# EAGLE board Smart Driver Adapter_backup (EAGLE 9.6.2)
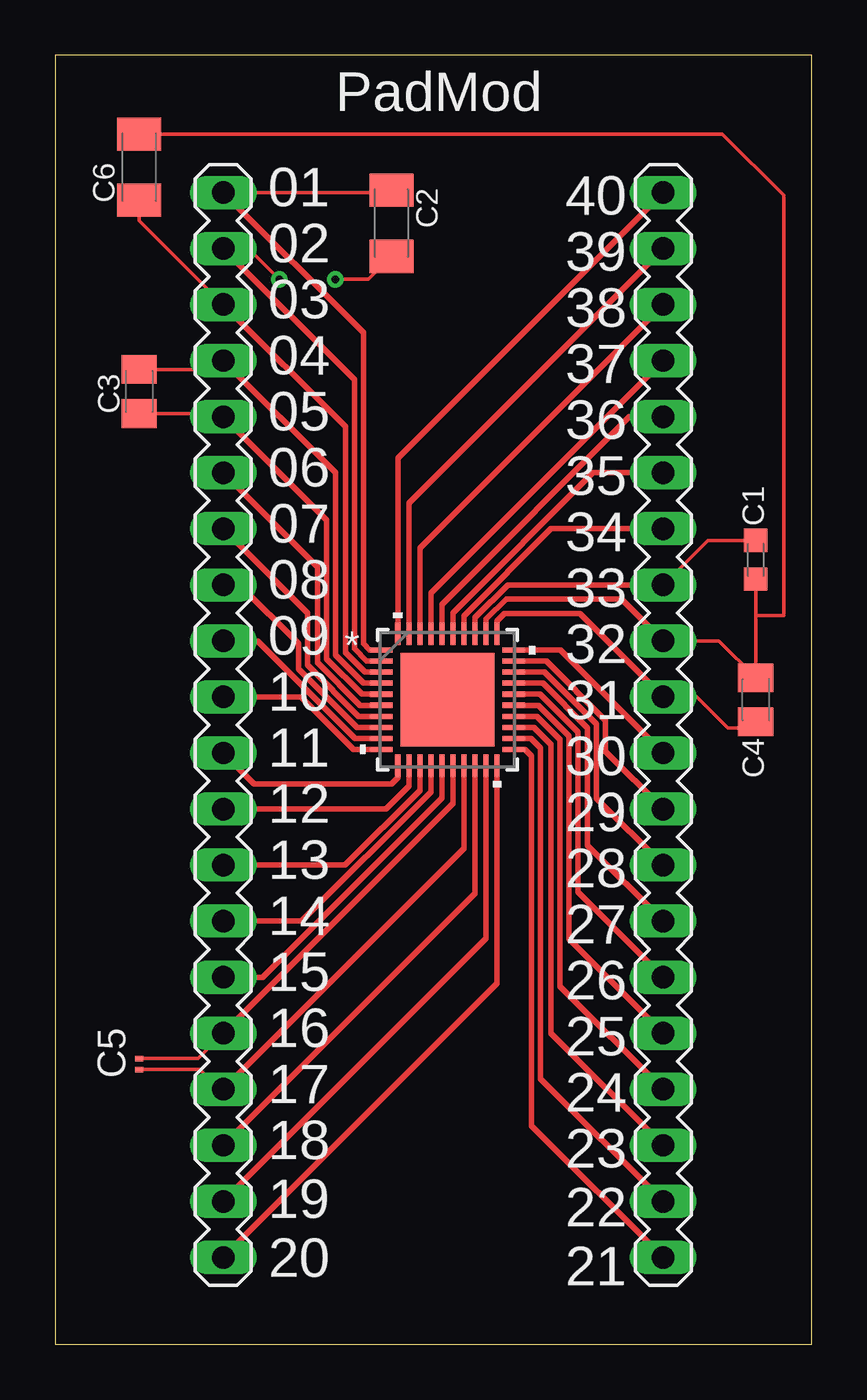
[diagram p0: board, top side]
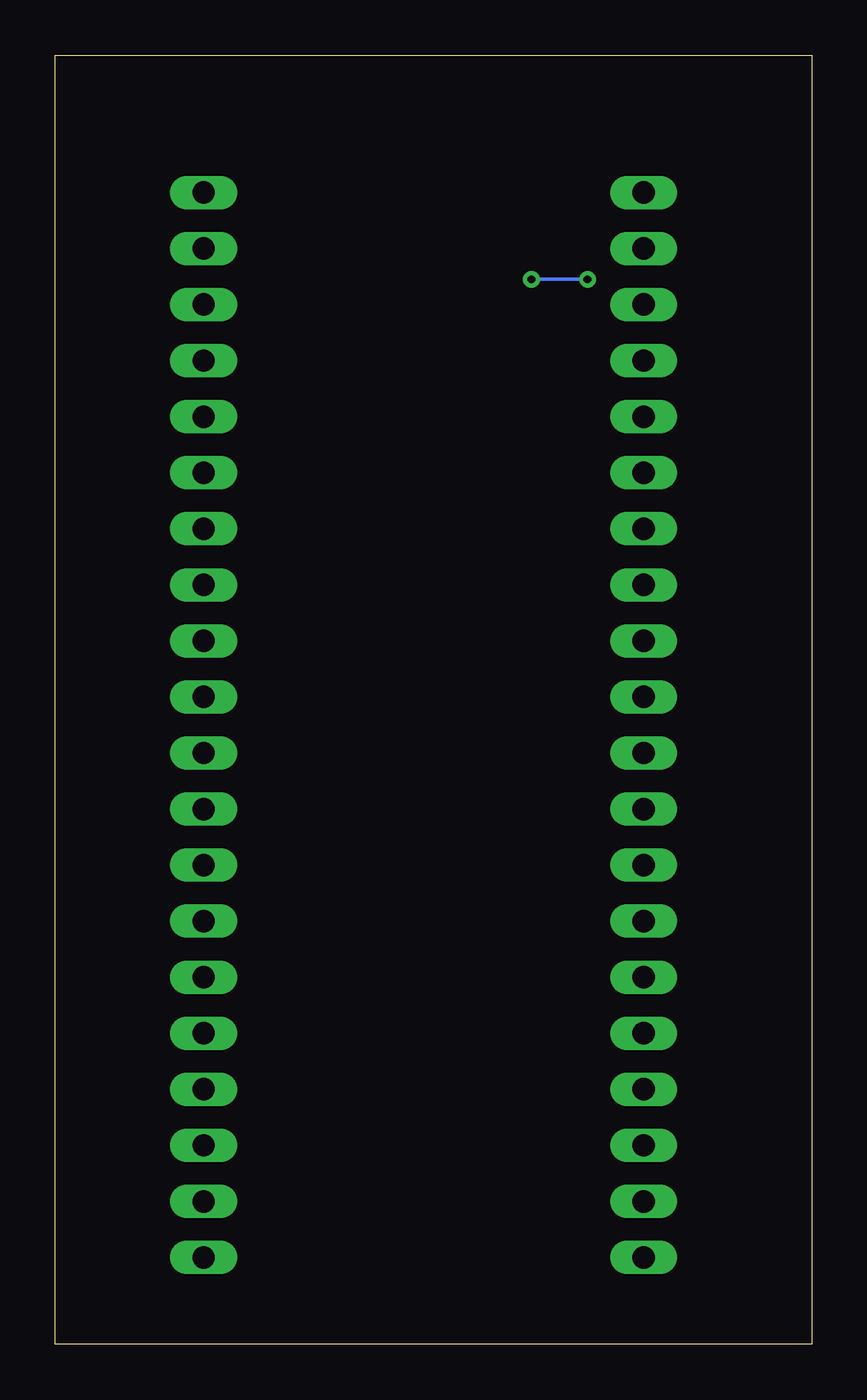
[diagram p1: board, bottom side, seen from below]

Size 34.29 x 58.42 mm. Coordinates in mm from the lower left corner, seen from the top.
Outline: 0,0 34.29,0 34.29,58.42 0,58.42 0,0
Copper layers (1*16): Top 0.035mm / dielectric 1.5mm / Bottom 0.035mm
Design rules "default": minimum track width 6mil, minimum drill 0.35mm, track to track 6mil, track to pad 6mil, pad to pad 6mil, via to via 6mil, smd to smd 6mil, copper to edge 40mil, drill to drill 6mil, minimum pad ring 10mil, minimum via ring 8mil, stop-mask expansion 4mil, vias tented up to drill 0mil, thermal gap 10mil

## Footprints (pad centres in the part's own frame; a part is rotated, then mirrored left to right if it is on the bottom)
C0603K = smd 1.05 x 1.08: 1 -0.875,0; 2 0.875,0
C1206K = smd 1.5 x 2: 1 -1.5,0; 2 1.5,0
C0805K = smd 1.3 x 1.6: 1 -1,0; 2 1,0
C0201 = smd 0.25 x 0.35: 1 -0.25,0; 2 0.25,0
MA20-1 = drill 1.016 long: 1 -24.13,0; 2 -21.59,0; 3 -19.05,0; 4 -16.51,0; 5 -13.97,0; 6 -11.43,0; 7 -8.89,0; 8 -6.35,0; 9 -3.81,0; 10 -1.27,0; 11 1.27,0; 12 3.81,0; 13 6.35,0; 14 8.89,0; 15 11.43,0; 16 13.97,0; 17 16.51,0; 18 19.05,0; 19 21.59,0; 20 24.13,0
WQFN_HMRTAT_TEX-M = smd 1.016 x 0.229: 1 -2.997,2.251; 2 -2.997,1.75; 3 -2.997,1.25; 4 -2.997,0.75; 5 -2.997,0.25; 6 -2.997,-0.25; 7 -2.997,-0.75; 8 -2.997,-1.25; 9 -2.997,-1.75; 10 -2.997,-2.251; 21 2.997,-2.251; 22 2.997,-1.75; 23 2.997,-1.25; 24 2.997,-0.75; 25 2.997,-0.25; 26 2.997,0.25; 27 2.997,0.75; 28 2.997,1.25; 29 2.997,1.75; 30 2.997,2.251 | smd 0.229 x 1.016: 11 -2.251,-2.997; 12 -1.75,-2.997; 13 -1.25,-2.997; 14 -0.75,-2.997; 15 -0.25,-2.997; 16 0.25,-2.997; 17 0.75,-2.997; 18 1.25,-2.997; 19 1.75,-2.997; 20 2.251,-2.997; 31 2.251,2.997; 32 1.75,2.997; 33 1.25,2.997; 34 0.75,2.997; 35 0.25,2.997; 36 -0.25,2.997; 37 -0.75,2.997; 38 -1.25,2.997; 39 -1.75,2.997; 40 -2.251,2.997 | smd 4.242 x 4.242: 41 0,0

## Placement (x,y rotation side)
C1  [C0603K]  31.75,35.56 270 top
C2  [C1206K]  15.24,50.8 270 top
C3  [C0805K]  3.81,43.18 90 top
C4  [C0805K]  31.75,29.21 90 top
C5  [C0201]  3.81,12.7 90 top
C6  [C1206K]  3.81,53.34 90 top
SV1  Header1  [MA20-1]  7.62,28.07 270 top
SV2  Header2  [MA20-1]  27.56,28.07 90 top
U2  DRV8353HMRTATWQFN_HMRTAT_TEX-M  [WQFN_HMRTAT_TEX-M]  17.78,29.21 0 top

## Library data of the parts
C1-C6 = rcl; SPICEPREFIX: C
SV1 SV2 = Modified_Header; OC_FARNELL: unknown; OC_NEWARK: unknown
U2 = DRV8353SMRTAT_ModPad; COPYRIGHT: Copyright (C) 2021 Ultra Librarian. All rights reserved.; DIGI-KEY_PART_NUMBER_1: 296-DRV8353HMRTATTR-ND; DIGI-KEY_PART_NUMBER_2: 296-DRV8353HMRTATCT-ND; DIGI-KEY_PART_NUMBER_3: 296-DRV8353HMRTATDKR-ND; MANUFACTURER_PART_NUMBER: DRV8353HMRTAT; MFR_NAME: Texas Instruments

## Nets
N$1: C1.1 SV2.13 U2.33
N$2: SV1.14 U2.14
N$3: C2.2 SV1.2 U2.2
N$4: C6.1 SV1.3 U2.3
N$5: C3.2 SV1.4 U2.4
N$6: C3.1 SV1.5 U2.5
N$7: SV1.6 U2.6
N$8: SV1.7 U2.7
N$9: SV1.8 U2.8
N$10: SV1.9 U2.9
N$11: SV1.10 U2.10
N$12: SV1.11 U2.11
N$13: SV1.13 U2.13
N$14: SV1.15 U2.15
N$15: C5.2 SV1.16 U2.16
N$16: C5.1 SV1.17 U2.17
N$17: SV1.18 U2.18
N$18: SV1.20 U2.20
N$19: SV2.20 U2.40
N$20: SV2.19 U2.39
N$21: SV2.18 U2.38
N$22: SV2.17 U2.37
N$23: SV2.16 U2.36
N$24: SV2.15 U2.35
N$25: SV2.14 U2.34
N$27: C1.2 C4.2 C6.2 SV2.12 U2.32
N$28: C4.1 SV2.11 U2.31
N$29: SV2.10 U2.30
N$30: SV2.9 U2.29
N$31: SV2.8 U2.28
N$32: SV2.7 U2.27
N$33: SV2.6 U2.26
N$34: SV2.5 U2.25
N$35: SV2.4 U2.24
N$36: SV2.3 U2.23
N$37: SV2.2 U2.22
N$38: SV2.1 U2.21
N$39: SV1.12 U2.12
N$40: SV1.19 U2.19
N$42: C2.1 SV1.1 U2.1

## Tracks (layer width: path | path; a pad name or v marks a point on that pad's centre or on a via)
N$1
  Top 0.152: C1.1 29.58,36.44 SV2.13
  Top 0.254: SV2.13 20.51,34.42 19.03,32.93 U2.33
N$2
  Top 0.254: SV1.14 11.18,19.18 17.03,25.03 U2.14
N$3  (via drill 0.35)
  Top 0.152: 7.52,49.73 SV1.2 8.76,49.66 v10.16,48.26 | v12.7,48.26 14.2,48.26 C2.2
  Top 0.254: SV1.2 13.56,43.71 13.56,31.52 14.12,30.96 U2.2
  Bottom 0.152: v10.16,48.26 v12.7,48.26
N$4
  Top 0.152: 7.52,47.14 SV1.3 3.81,50.93 C6.1
  Top 0.254: SV1.3 13.16,41.58 13.16,31.35 14.05,30.46 U2.3
N$5
  Top 0.152: C3.2 7.4,44.18 7.62,44.4 SV1.4
  Top 0.254: SV1.4 12.7,39.5 12.7,31.24 13.97,29.96 U2.4
N$6
  Top 0.152: SV1.5 7.48,42.18 C3.1
  Top 0.254: SV1.5 12.29,37.36 12.29,31.07 13.9,29.46 U2.5
N$7
  Top 0.254: SV1.6 11.89,35.23 11.89,30.9 13.83,28.96 U2.6
N$8
  Top 0.254: SV1.7 11.43,33.15 11.43,30.78 13.75,28.46 U2.7
N$9
  Top 0.254: SV1.8 8.36,34.42 11.02,31.75 11.02,30.61 13.68,27.96 U2.8
N$10
  Top 0.254: SV1.9 9.19,31.88 13.6,27.46 U2.9
N$11
  Top 0.254: SV1.10 11.15,29.34 13.53,26.96 U2.10
N$12
  Top 0.254: SV1.11 9.02,25.4 15.24,25.4 15.53,25.69 U2.11
N$13
  Top 0.254: SV1.13 13.14,21.72 16.53,25.11 U2.13
N$14
  Top 0.254: SV1.15 9.4,16.64 17.53,24.77 U2.15
N$15
  Top 0.152: 7.52,14.07 SV1.16 6.47,12.95 C5.2
  Top 0.254: SV1.16 18.03,24.51 U2.16
N$16
  Top 0.152: SV1.17 7.52,11.48 6.55,12.45 C5.1
  Top 0.254: SV1.17 18.53,22.47 U2.17
N$17
  Top 0.254: SV1.18 19.03,20.43 U2.18
N$18
  Top 0.254: SV1.20 20.03,16.35 U2.20
N$19
  Top 0.254: SV2.20 15.53,40.17 U2.40
N$20
  Top 0.254: SV2.19 16.03,38.13 U2.39
N$21
  Top 0.254: SV2.18 16.53,36.09 U2.38
N$22
  Top 0.254: SV2.17 17.03,34.05 U2.37
N$23
  Top 0.254: SV2.16 26.04,42.04 17.53,33.53 U2.36
N$24
  Top 0.254: SV2.15 24.38,39.5 18.03,33.14 U2.35
N$25
  Top 0.254: SV2.14 22.48,36.96 18.53,33.01 U2.34
N$27
  Top 0.152: 27.48,32.05 SV2.12 30.08,31.88 C4.2 31.75,33.02 | 31.75,33.02 C1.2 | C6.2 30.25,54.84 33.02,52.07 33.02,33.02 31.75,33.02
  Top 0.254: SV2.12 25.66,33.78 20.45,33.78 19.53,32.86 U2.32
N$28
  Top 0.152: SV2.11 29.08,29.34 30.48,27.94 31.48,27.94 C4.1
  Top 0.254: SV2.11 23.79,33.11 20.36,33.11 20.03,32.78 U2.31
N$29
  Top 0.254: SV2.10 22.89,31.46 U2.30
N$30
  Top 0.254: SV2.9 24.94,26.87 24.94,28.28 22.26,30.96 U2.29
N$31
  Top 0.254: SV2.8 24.54,24.74 24.54,28.11 22.18,30.46 U2.28
N$32
  Top 0.254: SV2.7 24.13,22.61 24.13,27.94 22.11,29.96 U2.27
N$33
  Top 0.254: SV2.6 23.7,20.5 23.7,27.74 21.98,29.46 U2.26
N$34
  Top 0.254: SV2.5 23.29,18.36 23.29,27.57 21.91,28.96 U2.25
N$35
  Top 0.254: SV2.4 22.89,16.23 22.89,27.41 21.83,28.46 U2.24
N$36
  Top 0.254: SV2.3 22.48,14.1 22.48,27.18 21.7,27.96 U2.23
N$37
  Top 0.254: SV2.2 22,12.04 22,27.03 21.56,27.46 U2.22
N$38
  Top 0.254: SV2.1 21.59,9.91 21.59,26.67 21.3,26.96 U2.21
N$39
  Top 0.254: SV1.12 14.99,24.26 16.03,25.3 U2.12
N$40
  Top 0.254: SV1.19 19.53,18.39 U2.19
N$42
  Top 0.152: SV1.1 15.14,52.2 C2.1
  Top 0.254: SV1.1 13.97,45.85 13.97,31.75 14.26,31.46 U2.1

## Text on the board
tPlace: PadMod | 01 | 40 | 02 | 39 | 03 | 38 | 04 | 37 | 05 | 36 | 06 | 35 | 07 | 34 | 08 | 33 | 09 | 32 | 10 | 31 | 11 | 30 | 12 | 29 | 13 | 28 | 14 | 27 | 15 | 26 | 16 | 25 | 17 | 24 | 18 | 23 | 19 | 22 | 20 | 21